# Allegro board f429.brd
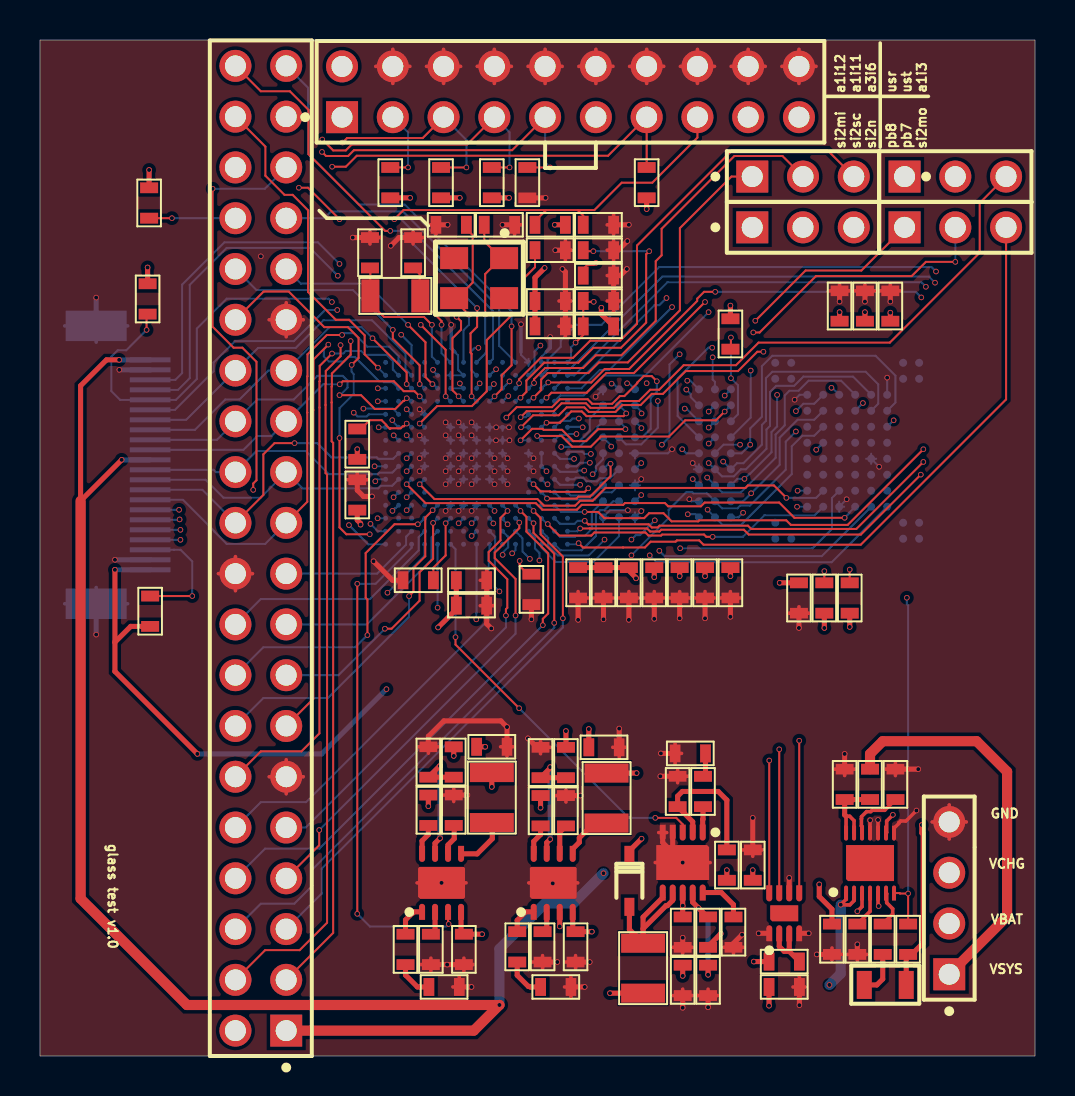
[diagram p0: board, top side]
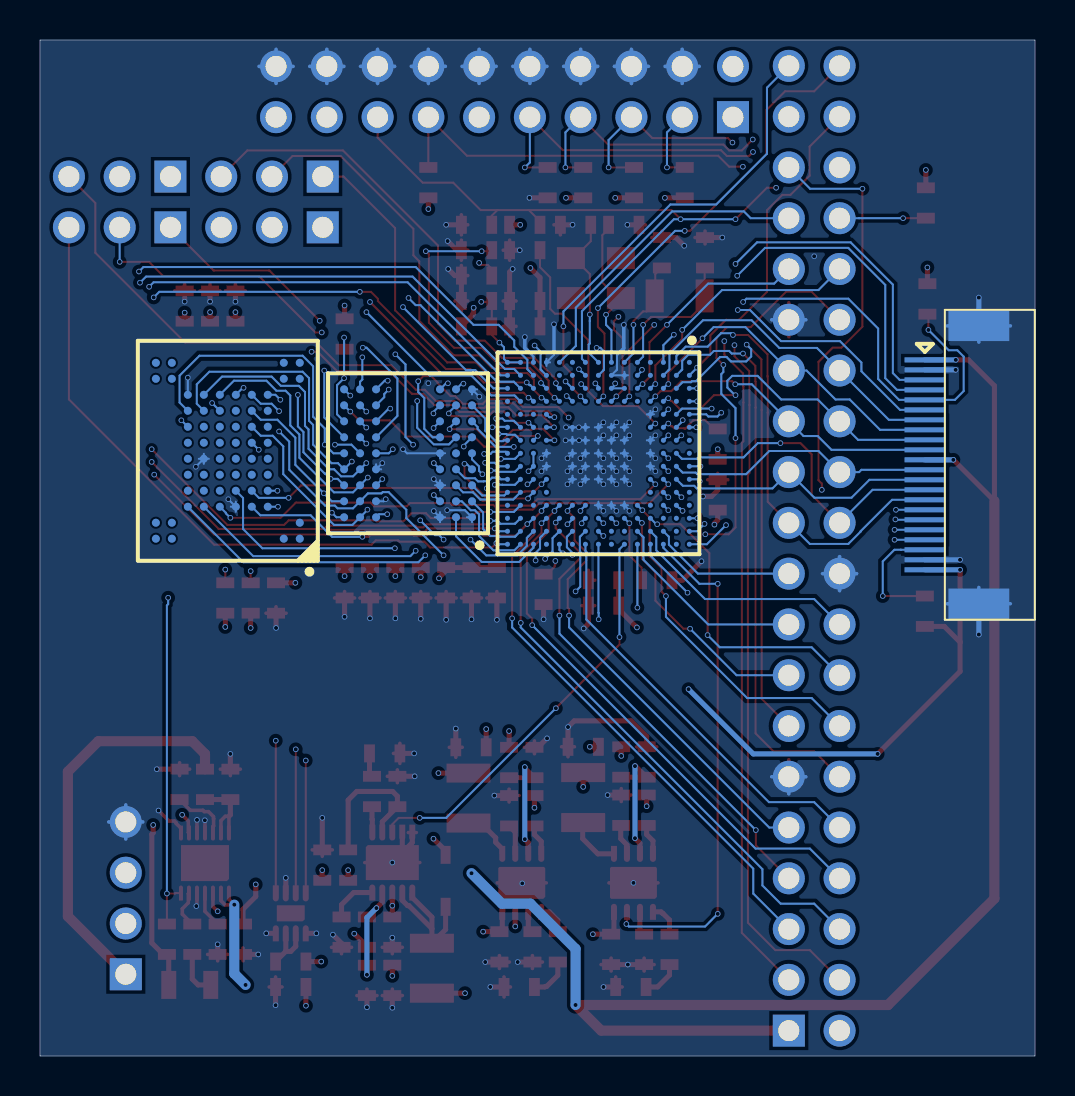
[diagram p1: board, bottom side, seen from below]

Outline 49.78 x 50.83 mm; copper layers: TOP, SIG, POWER, BOTTOM. Coordinates in mm from the lower left corner of the outline.
Outline path: 0,50.83 0,0 49.78,0 49.78,50.83 0,50.83

## Design rules (mm)
net group DATA_BUS: nets PD0 PD1 PD8 PD9 PD10 PD14 PD15 PE7 PE8 PE9 PE10 PE11 PE12 PE13 PE14 PE15
net group LCD_BUS: nets PE5 PE6 PG6 PH2 PH3 PH8 PH9 PH10 PH11 PH12 PH13 PH14 PH15 PI0 PI1 PI2
net group SDRAM_ADD_BUS: nets PF0 PF1 PF2 PF3 PF4 PF5 PF12 PF13 PF14 PF15 PG0 PG1 PG2 PG4 PG5

## Placement (name value [footprint] x y rotation side)
C1  20pF  [0603]  20.57 41.58 0 top
C2  12pF  [0603]  16.51 40.18 270 top
C3  0.1uF  [0603]  27.94 41.58 0 top
C4  0.1uF  [0603]  27.94 37.77 0 top
C5  0.1uF  [0603]  21.59 23.8 0 top
C6  0.1uF  [0603]  21.59 22.53 0 top
C7  0.1uF  [0603]  25.53 36.5 0 top
C8  0.1uF  [0603]  25.53 37.77 0 top
C9  0.1uF  [0603]  26.92 23.67 270 top
C10  0.1uF  [0603]  15.88 28.07 90 top
C19  0.1uF  [0603]  24.59 23.34 270 top
C20  0.1uF  [0603]  18.92 23.8 180 top
C21  4.7uF  [0603]  35.66 9.55 270 top
C23  33nF  [0603]  34.7 6.2 270 top
C24  1nF  [0603]  32.54 15.14 0 top
C25  1uF  [0603]  33.43 3.78 90 top
C26  1uF  [0603]  32.16 6.2 90 top
C27  4.7uF  [0603]  32.16 3.78 90 top
C28  560pF  [0603]  25.81 3.45 180 top
C29  10nF  [0603]  25.15 5.46 90 top
C30  0.1uF  [0603]  37.24 3.45 180 top
C31  4.7uF  [0603]  26.8 5.46 90 top
C32  4.7uF  [0603]  28.22 15.44 180 top
C33  4.7uF  [0603]  40.26 13.59 90 top
C34  560pF  [0603]  20.22 3.45 180 top
C35  10nF  [0603]  19.56 5.33 90 top
C36  4.7uF  [0603]  39.62 5.84 90 top
C37  0.1uF  [0603]  40.89 5.84 90 top
C38  4.7uF  [0603]  21.21 5.33 90 top
C39  4.7uF  [0603]  22.61 15.47 180 top
C40  0.1uF  [0603]  42.55 37.52 90 top
C41  0.1uF  [0603]  41.27 37.52 90 top
C42  0.1uF  [0603]  40.01 37.52 90 top
C43  0.1uF  [0603]  37.97 22.91 270 top
C44  0.1uF  [0603]  30.73 23.67 270 top
C45  0.1uF  [0603]  32 23.67 270 top
C46  0.1uF  [0603]  33.27 23.67 270 top
C47  0.1uF  [0603]  34.54 23.67 270 top
C48  0.1uF  [0603]  29.46 23.67 270 top
C49  0.1uF  [0603]  28.19 23.67 270 top
C51  20pF  [0603]  22.99 41.58 180 top
C52  12pF  [0603]  18.67 40.18 270 top
D1  1n5819  [SOD323]  29.49 8.76 270 top
D2  LED  [0805]  42.29 3.56 0 top
F1  -  [FPC-22]  5.51 34.82 270 bottom
J1  CON3  [H-3]  35.64 43.99 0 top
J2  CON3  [H-3]  43.26 43.99 0 top
J3  CON3  [H-3]  35.64 41.45 0 top
J4  CON3  [H-3]  43.26 41.45 0 top
J5  CON4  [H-4]  45.49 4.09 90 top
L1  10uH  [0603]  27.94 36.5 180 top
L2  1uH  [1008]  30.18 4.39 270 top
L3  1uH  [1008]  28.35 12.9 90 top
L4  1uH  [1008]  22.61 12.93 90 top
O1  OSC-CLK  [OSC-3215]  17.78 38.02 180 top
O2  25M  [OSC-3225]  21.97 38.91 270 top
P1  JTAG  [H-10-2]  15.11 46.96 0 top
P2  LCD  [H-20-2]  12.32 1.27 90 top
R1  10K  [0603]  25.53 41.58 180 top
R2  10K  [0603]  25.53 40.31 0 top
R3  10K  [0603]  27.94 39.04 0 top
R4  10K  [0603]  22.61 43.69 90 top
R5  10K  [0603]  17.53 43.69 90 top
R6  10K  [0603]  20.07 43.69 90 top
R7  10K  [0603]  24.38 43.69 90 top
R8  10K  [0603]  15.88 30.61 270 top
R9  10K  [0603]  30.35 43.69 90 top
R10  10K  [0603]  27.94 40.31 0 top
R11  30K  [0603]  34.37 9.55 90 top
R12  56K  [0603]  33.17 13.23 270 top
R13  10K  [0603]  31.9 13.23 270 top
R14  10  [0603]  33.43 6.2 270 top
R15  0  [0603]  37.24 4.72 0 top
R16  22K  [0603]  25.04 14.68 90 top
R17  33K  [0603]  23.88 5.46 90 top
R18  100K  [0603]  25.04 12.27 270 top
R19  330K  [0603]  26.31 12.27 270 top
R20  68K  [0603]  26.31 14.68 270 top
R21  100K  [0603]  43.43 5.84 270 top
R22  2K  [0603]  42.16 5.84 270 top
R23  0  [0603]  41.53 13.59 90 top
R24  22K  [0603]  18.29 5.33 90 top
R25  22K  [0603]  19.43 14.71 90 top
R26  22K  [0603]  42.8 13.59 90 top
R27  100K  [0603]  19.43 12.29 270 top
R28  330K  [0603]  20.7 12.29 270 top
R29  47K  [0603]  20.7 14.71 270 top
R30  10K  [0603]  5.38 37.87 270 top
R31  10K  [0603]  5.46 42.67 90 top
R32  10K  [0603]  5.51 22.25 90 top
R33  10K  [0603]  40.51 22.91 270 top
R34  10K  [0603]  39.24 22.91 90 top
R35  10K  [0603]  34.54 36.12 90 top
U1  STM32F429  [STM32F429-UFBGA176]  21.84 30.15 270 bottom
U2  RT8509  [RT8509-DFN10]  32.16 9.68 270 top
U3  MAX17048  [MAX17048-TDFN8]  37.24 7.14 90 top
U4  RT8065  [RT8065-DFN8]  25.68 8.66 90 top
U5  MAX8856  [MAX8856-TDFN14]  41.53 9.65 90 top
U6  RT8065  [RT8065-DFN8]  20.09 8.66 90 top
U7  MT29F4G08ABAEAH4  [MT29F4G08ABAEAH4-VFBGA63]  40.39 30.28 0 bottom
U8  MT48LC8M16A2  [MT48LC8M16A2-VFBGA54]  31.37 30.15 0 bottom

## Library data of the parts
C1-C10 C19-C21 C23-C49 C51 C52 = CAP NP
D1 = 1n5819
D2 = LED
F1 = FPC-22
J1-J4 = CON3
J5 = CON4
L1-L4 = INDUCTOR
O1 = OSC-CLK
O2 = OSC-N
P1 = JTAG
P2 = LCD
R1-R35 = R
U1 = STM32F429
U2 = RT8509
U3 = MAX17048
U4 U6 = RT8065
U5 = MAX8856
U7 = MT29F4G08ABAEAH4
U8 = MT48LC8M16A2

## Footprints (pads in the part's own frame, mm; a bottom-side part is the same pattern mirrored in y, then rotated)
0603
  rect 0.54x0.9 smd: 1(-0.76,0) 2(0.76,0)
0805
  rect 0.75x1.4 smd: 1(-1.05,0) 2(1.05,0)
1008
  rect 0.95x2.2 smd: 1(-1.25,0) 2(1.25,0)
FPC-22
  rect 0.254x2.032 smd: 1(0,0) 2(0.5,0) 3(1,0) 4(1.5,0) 5(2,0) 6(2.5,0) 7(3,0) 8(3.5,0) 9(4,0) 10(4.5,0) 11(5,0) 12(5.5,0) 13(6,0) 14(6.5,0) 15(7,0) 16(7.5,0) 17(8,0) 18(8.5,0) 19(9,0) 20(9.5,0) 21(10,0) 22(10.5,0)
  rect 1.524x3.048 smd: 23(-1.7,2.7) 24(12.2,2.7)
H-3
  rect 1.6x1.6 hole 1.05: 1(0,0)
  round 1.6 hole 1.05: 2(2.54,0) 3(5.08,0)
H-4
  rect 1.6x1.6 hole 1.05: 1(0,0)
  round 1.6 hole 1.05: 2(2.54,0) 3(5.08,0) 4(7.62,0)
H-10-2
  rect 1.6x1.6 hole 1.05: 1(0,0)
  round 1.6 hole 1.05: 2(0,2.54) 3(2.54,0) 4(2.54,2.54) 5(5.08,0) 6(5.08,2.54) 7(7.62,0) 8(7.62,2.54) 9(10.16,0) 10(10.16,2.54) 11(12.7,0) 12(12.7,2.54) 13(15.24,0) 14(15.24,2.54) 15(17.78,0) 16(17.78,2.54) 17(20.32,0) 18(20.32,2.54) 19(22.86,0) 20(22.86,2.54)
H-20-2
  rect 1.6x1.6 hole 1.05: 1(0,0)
  round 1.6 hole 1.05: 2(0,2.54) 3(2.54,0) 4(2.54,2.54) 5(5.08,0) 6(5.08,2.54) 7(7.62,0) 8(7.62,2.54) 9(10.16,0) 10(10.16,2.54) 11(12.7,0) 12(12.7,2.54) 13(15.24,0) 14(15.24,2.54) 15(17.78,0) 16(17.78,2.54) 17(20.32,0) 18(20.32,2.54) 19(22.86,0) 20(22.86,2.54) 21(25.4,0) 22(25.4,2.54) 23(27.94,0) 24(27.94,2.54) 25(30.48,0) 26(30.48,2.54) 27(33.02,0) 28(33.02,2.54) 29(35.56,0) 30(35.56,2.54) 31(38.1,0) 32(38.1,2.54) 33(40.64,0) 34(40.64,2.54) 35(43.18,0) 36(43.18,2.54) 37(45.72,0) 38(45.72,2.54) 39(48.26,0) 40(48.26,2.54)
MAX8856-TDFN14
  custom 0.75x0.2 smd: 1(-1.5,1.2) 2(-1.5,0.8) 3(-1.5,0.4) 4(-1.5,0) 5(-1.5,-0.4) 6(-1.5,-0.8) 7(-1.5,-1.2) 8(1.5,-1.2) 9(1.5,-0.8) 10(1.5,-0.4) 11(1.5,0) 12(1.5,0.4) 13(1.5,0.8) 14(1.5,1.2)
  custom 1.8x2.4 smd: 15(0,0)
MAX17048-TDFN8
  custom 0.8x0.3 smd: 1(-1,0.75) 2(-1,0.25) 3(-1,-0.25) 4(-1,-0.75) 5(1,-0.75) 6(1,-0.25) 7(1,0.25) 8(1,0.75)
  custom 0.8x1.4 smd: 9(0,0)
MT29F4G08ABAEAH4-VFBGA63
  round 0.4 smd: A1(-3.6,4.4) A2(-2.8,4.4) A9(2.8,4.4) A10(3.6,4.4) B1(-3.6,3.6) B9(2.8,3.6) B10(3.6,3.6) C3(-2,2.8) C4(-1.2,2.8) C5(-0.4,2.8) C6(0.4,2.8) C7(1.2,2.8) C8(2,2.8) D3(-2,2) D4(-1.2,2) D5(-0.4,2) D6(0.4,2) D7(1.2,2) D8(2,2) E3(-2,1.2) E4(-1.2,1.2) E5(-0.4,1.2) E6(0.4,1.2) E7(1.2,1.2) E8(2,1.2) F3(-2,0.4) F4(-1.2,0.4) F5(-0.4,0.4) F6(0.4,0.4) F7(1.2,0.4) F8(2,0.4) G3(-2,-0.4) G4(-1.2,-0.4) G5(-0.4,-0.4) G6(0.4,-0.4) G7(1.2,-0.4) G8(2,-0.4) H3(-2,-1.2) H4(-1.2,-1.2) H5(-0.4,-1.2) H6(0.4,-1.2) H7(1.2,-1.2) H8(2,-1.2) J3(-2,-2) J4(-1.2,-2) J5(-0.4,-2) J6(0.4,-2) J7(1.2,-2) J8(2,-2) K3(-2,-2.8) K4(-1.2,-2.8) K5(-0.4,-2.8) K6(0.4,-2.8) K7(1.2,-2.8) K8(2,-2.8) L1(-3.6,-3.6) L2(-2.8,-3.6) L9(2.8,-3.6) L10(3.6,-3.6) M1(-3.6,-4.4) M2(-2.8,-4.4) M9(2.8,-4.4) M10(3.6,-4.4)
MT48LC8M16A2-VFBGA54
  round 0.4 smd: A1(-3.2,3.2) A2(-2.4,3.2) A3(-1.6,3.2) A7(1.6,3.2) A8(2.4,3.2) A9(3.2,3.2) B1(-3.2,2.4) B2(-2.4,2.4) B3(-1.6,2.4) B7(1.6,2.4) B8(2.4,2.4) B9(3.2,2.4) C1(-3.2,1.6) C2(-2.4,1.6) C3(-1.6,1.6) C7(1.6,1.6) C8(2.4,1.6) C9(3.2,1.6) D1(-3.2,0.8) D2(-2.4,0.8) D3(-1.6,0.8) D7(1.6,0.8) D8(2.4,0.8) D9(3.2,0.8) E1(-3.2,0) E2(-2.4,0) E3(-1.6,0) E7(1.6,0) E8(2.4,0) E9(3.2,0) F1(-3.2,-0.8) F2(-2.4,-0.8) F3(-1.6,-0.8) F7(1.6,-0.8) F8(2.4,-0.8) F9(3.2,-0.8) G1(-3.2,-1.6) G2(-2.4,-1.6) G3(-1.6,-1.6) G7(1.6,-1.6) G8(2.4,-1.6) G9(3.2,-1.6) H1(-3.2,-2.4) H2(-2.4,-2.4) H3(-1.6,-2.4) H7(1.6,-2.4) H8(2.4,-2.4) H9(3.2,-2.4) J1(-3.2,-3.2) J2(-2.4,-3.2) J3(-1.6,-3.2) J7(1.6,-3.2) J8(2.4,-3.2) J9(3.2,-3.2)
OSC-3215
  rect 0.9x1.65 smd: 1(-1.25,0) 2(1.25,0)
OSC-3225
  rect 1.1x1.4 smd: 1(-1,1.25) 2(-1,-1.25) 3(1,-1.25) 4(1,1.25)
RT8065-DFN8
  custom 0.8x0.3 smd: 1(-1.45,0.975) 2(-1.45,0.325) 3(-1.45,-0.325) 4(-1.45,-0.975) 5(1.45,-0.975) 6(1.45,-0.325) 7(1.45,0.325) 8(1.45,0.975)
  custom 1.6x2.35 smd: 9(0,0)
RT8509-DFN10
  custom 0.8x0.3 smd: 1(-1.5,1) 2(-1.5,0.5) 3(-1.5,0) 4(-1.5,-0.5) 5(-1.5,-1) 6(1.5,-1) 7(1.5,-0.5) 8(1.5,0) 9(1.5,0.5) 10(1.5,1)
  custom 1.75x2.65 smd: 11(0,0)
SOD323
  rect 0.9x0.5 smd: 1(-1.3,0) 2(1.3,0)
STM32F429-UFBGA176
  round 0.25 smd: A1(-4.55,4.55) A2(-3.9,4.55) A3(-3.25,4.55) A4(-2.6,4.55) A5(-1.95,4.55) A6(-1.3,4.55) A7(-0.65,4.55) A8(0,4.55) A9(0.65,4.55) A10(1.3,4.55) A11(1.95,4.55) A12(2.6,4.55) A13(3.25,4.55) A14(3.9,4.55) A15(4.55,4.55) B1(-4.55,3.9) B2(-3.9,3.9) B3(-3.25,3.9) B4(-2.6,3.9) B5(-1.95,3.9) B6(-1.3,3.9) B7(-0.65,3.9) B8(0,3.9) B9(0.65,3.9) B10(1.3,3.9) B11(1.95,3.9) B12(2.6,3.9) B13(3.25,3.9) B14(3.9,3.9) B15(4.55,3.9) C1(-4.55,3.25) C2(-3.9,3.25) C3(-3.25,3.25) C4(-2.6,3.25) C5(-1.95,3.25) C6(-1.3,3.25) C7(-0.65,3.25) C8(0,3.25) C9(0.65,3.25) C10(1.3,3.25) C11(1.95,3.25) C12(2.6,3.25) C13(3.25,3.25) C14(3.9,3.25) C15(4.55,3.25) D1(-4.55,2.6) D2(-3.9,2.6) D3(-3.25,2.6) D4(-2.6,2.6) D5(-1.95,2.6) D6(-1.3,2.6) D7(-0.65,2.6) D8(0,2.6) D9(0.65,2.6) D10(1.3,2.6) D11(1.95,2.6) D12(2.6,2.6) D13(3.25,2.6) D14(3.9,2.6) D15(4.55,2.6) E1(-4.55,1.95) E2(-3.9,1.95) E3(-3.25,1.95) E4(-2.6,1.95) E12(2.6,1.95) E13(3.25,1.95) E14(3.9,1.95) E15(4.55,1.95) F1(-4.55,1.3) F2(-3.9,1.3) F3(-3.25,1.3) F4(-2.6,1.3) F6(-1.3,1.3) F7(-0.65,1.3) F8(0,1.3) F9(0.65,1.3) F10(1.3,1.3) F12(2.6,1.3) F13(3.25,1.3) F14(3.9,1.3) F15(4.55,1.3) G1(-4.55,0.65) G2(-3.9,0.65) G3(-3.25,0.65) G4(-2.6,0.65) G6(-1.3,0.65) G7(-0.65,0.65) G8(0,0.65) G9(0.65,0.65) G10(1.3,0.65) G12(2.6,0.65) G13(3.25,0.65) G14(3.9,0.65) G15(4.55,0.65) H1(-4.55,0) H2(-3.9,0) H3(-3.25,0) H4(-2.6,0) H6(-1.3,0) H7(-0.65,0) H8(0,0) H9(0.65,0) H10(1.3,0) H12(2.6,0) H13(3.25,0) H14(3.9,0) H15(4.55,0) J1(-4.55,-0.65) J2(-3.9,-0.65) J3(-3.25,-0.65) J4(-2.6,-0.65) J6(-1.3,-0.65) J7(-0.65,-0.65) J8(0,-0.65) J9(0.65,-0.65) J10(1.3,-0.65) J12(2.6,-0.65) J13(3.25,-0.65) J14(3.9,-0.65) J15(4.55,-0.65) K1(-4.55,-1.3) K2(-3.9,-1.3) K3(-3.25,-1.3) K4(-2.6,-1.3) K6(-1.3,-1.3) K7(-0.65,-1.3) K8(0,-1.3) K9(0.65,-1.3) K10(1.3,-1.3) K12(2.6,-1.3) K13(3.25,-1.3) K14(3.9,-1.3) K15(4.55,-1.3) L1(-4.55,-1.95) L2(-3.9,-1.95) L3(-3.25,-1.95) L4(-2.6,-1.95) L12(2.6,-1.95) L13(3.25,-1.95) L14(3.9,-1.95) L15(4.55,-1.95) M1(-4.55,-2.6) M2(-3.9,-2.6) M3(-3.25,-2.6) M4(-2.6,-2.6) M5(-1.95,-2.6) M6(-1.3,-2.6) M7(-0.65,-2.6) M8(0,-2.6) M9(0.65,-2.6) M10(1.3,-2.6) M11(1.95,-2.6) M12(2.6,-2.6) M13(3.25,-2.6) M14(3.9,-2.6) M15(4.55,-2.6) N1(-4.55,-3.25) N2(-3.9,-3.25) N3(-3.25,-3.25) N4(-2.6,-3.25) N5(-1.95,-3.25) N6(-1.3,-3.25) N7(-0.65,-3.25) N8(0,-3.25) N9(0.65,-3.25) N10(1.3,-3.25) N11(1.95,-3.25) N12(2.6,-3.25) N13(3.25,-3.25) N14(3.9,-3.25) N15(4.55,-3.25) P1(-4.55,-3.9) P2(-3.9,-3.9) P3(-3.25,-3.9) P4(-2.6,-3.9) P5(-1.95,-3.9) P6(-1.3,-3.9) P7(-0.65,-3.9) P8(0,-3.9) P9(0.65,-3.9) P10(1.3,-3.9) P11(1.95,-3.9) P12(2.6,-3.9) P13(3.25,-3.9) P14(3.9,-3.9) P15(4.55,-3.9) R1(-4.55,-4.55) R2(-3.9,-4.55) R3(-3.25,-4.55) R4(-2.6,-4.55) R5(-1.95,-4.55) R6(-1.3,-4.55) R7(-0.65,-4.55) R8(0,-4.55) R9(0.65,-4.55) R10(1.3,-4.55) R11(1.95,-4.55) R12(2.6,-4.55) R13(3.25,-4.55) R14(3.9,-4.55) R15(4.55,-4.55)

## Nets
2.5V: C39.2 F1.22 L4.2 R29.1 R32.1
3.3V: C5.1 C6.1 C7.1 C8.1 C9.1 C10.1 C32.2 C40.1 C41.1 C42.1 C43.1 C44.1 C45.1 C46.1 C47.1 C48.1 C49.1 D2.2(ANODE) L1.1 L3.2 P2.2(3.3V) R1.1 R4.1 R5.1 R6.1 R8.2 R9.1 R20.1 R21.2 R30.1 R31.2 R33.2 R34.1 R35.2 U1.C5(VDD1) U1.C7(VDD2) U1.C8(VDD3) U1.C9(VDD4) U1.F3(VDD5) U1.G3(VDD6) U1.G13(VDD7) U1.H13(VDD8) U1.J12(VDD9) U1.J13(VDD10) U1.K4(VDD11) U1.N8(VDD12) U1.N9(VDD13) U1.N10(VDD14) U5.9(E\N\2\) U7.D3(VCC1) U7.G4(VCC3) U7.H8(VCC2) U7.J6(VCC4) U8.A7(VDDQ1) U8.A9(VDD1) U8.B3(VDDQ2) U8.C7(VDDQ3) U8.D3(VDDQ4) U8.E7(VDD2) U8.J9(VDD3)
5V: C21.2 C26.2 D1.1 F1.1 F1.11 P2.1(5V) R11.1 U2.8(VSUP)
GND: C1.1 C2.1 C3.2 C4.2 C5.2 C6.2 C7.2 C8.2 C9.2 C10.2 C19.2 C20.2 C21.1 C23.2 C24.1 C25.1 C26.1 C27.1 C28.1 C29.1 C30.1 C31.1 C32.1 C33.2 C34.1 C35.1 C36.1 C37.1 C38.1 C39.1 C40.2 C41.2 C42.2 C43.2 C44.2 C45.2 C46.2 C47.2 C48.2 C49.2 C51.1 C52.1 F1.2 F1.21 F1.23 F1.24 J5.4 P1.4(GND1) P1.6(GND2) P1.8(GND3) P1.10(GND4) P1.12(GND5) P1.14(GND6) P1.16(GND7) P1.18(GND8) P1.20(GND9) P2.11(GND1) P2.20(GND3) P2.29(GND2) R2.2 R3.2 R7.1 R10.2 R13.1 R16.2 R19.1 R25.2 R26.2 R28.1 U1.D5(VSS1) U1.D7(VSS2) U1.D8(VSS3) U1.D9(VSS4) U1.F2(VSS5) U1.F6(VSS6) U1.F7(VSS7) U1.F8(VSS8) U1.F9(VSS9) U1.F10(VSS10) U1.F12(VSS11) U1.G2(VSS12) U1.G6(VSS13) U1.G7(VSS14) U1.G8(VSS15) U1.G9(VSS16) U1.G10(VSS17) U1.G12(VSS18) U1.H6(VSS19) U1.H7(VSS20) U1.H8(VSS21) U1.H9(VSS22) U1.H10(VSS23) U1.H12(VSS24) U1.J6(VSS25) U1.J7(VSS26) U1.J8(VSS27) U1.J9(VSS28) U1.J10(VSS29) U1.K6(VSS30) U1.K7(VSS31) U1.K8(VSS32) U1.K9(VSS33) U1.K10(VSS34) U1.M1(VSSA) U1.M8(VSS35) U1.M9(VSS36) U1.N1(VREF-) U2.4(GND1) U2.5(GND2) U2.11(GND3) U3.1(CTG) U3.4(GND) U3.6(QSTRT) U4.9(GND) U5.5(THM) U5.8(GATE) U5.10(E\N\1\) U5.11(GND) U6.9(GND) U7.C5(VSS3) U7.F7(VSS4) U7.K3(VSS1) U7.K8(VSS2) U8.A1(VSS1) U8.A3(VSSQ1) U8.B7(VSSQ2) U8.C3(VSSQ3) U8.D7(VSSQ4) U8.E3(VSS2) U8.J1(VSS3)
VBAT: C30.2 J5.2 R15.1 U5.1(BAT1) U5.2(BAT2)
VDDA: C4.1 L1.2 U1.C1(VBAT) U1.P1(VREF+) U1.R1(VDDA)
BOOT0: R2.1 U1.D6(BOOT0)
BOOT1: R3.1 U1.M6(PB2(BOOT1))
BYPASS: R10.1 U1.L4(BYPASS_REG)
OSC32-IN: C2.2 O1.2(X2) U1.E1(PC14(OSC32_IN))
OSC32-OUT: C52.2 O1.1(X1) U1.F1(PC15(OSC32_OUT))
OSC-IN: C1.2 O2.3(X2) U1.G1(PH0(OSC_IN))
OSC-OUT: C51.2 O2.1(X1) U1.H1(PH1(OSC_OUT)
PA0: R21.1 U1.N3(PA0) U5.7(P\O\K\)
PA1: U1.N2(PA1) U3.5(A\L\R\T\)
PA2: U1.P2(PA2) U3.7(SCL)
PA3: U1.R2(PA3) U3.8(SDA)
PA4: F1.3 U1.N4(PA4)
PA5: F1.4 U1.P4(PA5)
PA6: F1.5 R30.2 U1.P3(PA6)
PA7: F1.6 U1.R3(PA7)
PA8: U1.F15(PA8) U2.3(EN)
PA9: J2.2 U1.E15(PA9)
PA10: J2.1 U1.D15(PA10)
PA11: U1.C15(PA11) U6.3(EN)
PB5: U1.A6(PB5) U8.F3(CKE)
PB6: R35.1 U1.B6(PB6) U8.G9(C\S\)
PB7: J4.2 U1.B5(PB7)
PB8: J4.1 U1.A5(PB8)
PB12: J3.3 U1.P12(PB12)
PB13: J3.2 U1.P13(PB13)
PB14: J3.1 U1.R14(PB14)
PB15: J4.3 U1.R15(PB15)
PC0: U1.M2(PC0) U8.F9(W\E\)
PC1: J1.2 U1.M3(PC1)
PC2: J1.1 U1.M4(PC2)
PC3: J2.3 U1.M5(PC3)
PC6: P2.35(USART_TX) U1.H15(PC6)
PD0: U1.B12(PD0) U7.K4(I/O2) U8.B8(DQ2)
PD1: U1.C12(PD1) U7.K5(I/O3) U8.C9(DQ3)
PD4: U1.D10(PD4) U7.D4(R\E\)
PD5: U1.C11(PD5) U7.C7(W\E\)
PD6: U1.B11(PD6) U7.C8(R\/\B\)
PD8: U1.P15(PD8) U8.B2(DQ13)
PD9: U1.P14(PD9) U8.B1(DQ14)
PD10: U1.N15(PD10) U8.A2(DQ15)
PD11: U1.N14(PD11) U7.D5(CLE)
PD12: U1.N13(PD12) U7.C4(ALE)
PD14: U1.M14(PD14) U7.H4(I/O0) U8.A8(DQ0)
PD15: U1.L14(PD15) U7.J4(I/O1) U8.B9(DQ1)
PDR_ON: R8.1 U1.C6(PDR_ON)
PE0: U1.A4(PE0) U8.E8(DQML)
PE1: U1.A3(PE1) U8.F1(DQMH)
PE2: P2.38(INT) U1.A2(PE2)
PE4: F1.15 P2.21(B0) U1.B1(PE4)
PE5: P2.12(G0) U1.B2(PE5)
PE6: P2.13(G1) U1.B3(PE6)
PE7: U1.R8(PE7) U7.K6(I/O4) U8.C8(DQ4)
PE8: U1.P8(PE8) U7.J7(I/O5) U8.D9(DQ5)
PE9: U1.P9(PE9) U7.K7(I/O6) U8.D8(DQ6)
PE10: U1.R9(PE10) U7.J8(I/O7) U8.E9(DQ7)
PE11: U1.P10(PE11) U8.E1(DQ8)
PE12: U1.R10(PE12) U8.D2(DQ9)
PE13: U1.N11(PE13) U8.D1(DQ10)
PE14: U1.P11(PE14) U8.C2(DQ11)
PE15: U1.R11(PE15) U8.C1(DQ12)
PF0: U1.E2(PF0) U8.H7(A0)
PF1: U1.H3(PF1) U8.H8(A1)
PF2: U1.H2(PF2) U8.J8(A2)
PF3: U1.J2(PF3) U8.J7(A3)
PF4: U1.J3(PF4) U8.J3(A4)
PF5: U1.K3(PF5) U8.J2(A5)
PF8: J1.3 U1.L3(PF8)
PF10: F1.16 P2.33(DE) U1.L1(PF10)
PF11: U1.R6(PF11) U8.F8(R\A\S\)
PF12: U1.P6(PF12) U8.H3(A6)
PF13: U1.N6(PF13) U8.H2(A7)
PF14: U1.R7(PF14) U8.H1(A8)
PF15: U1.P7(PF15) U8.G3(A9)
PG0: U1.N7(PG0) U8.H9(A10)
PG1: U1.M7(PG1) U8.G2(A11)
PG2: U1.L15(PG2) U8.G1(NC/A12)
PG4: U1.K14(PG4) U8.G7(BA0)
PG5: U1.K13(PG5) U8.G8(BA1)
PG6: P2.10(R7) U1.J15(PG6)
PG7: F1.19 P2.30(CLK) U1.J14(PG7)
PG8: U1.H14(PG8) U8.F2(CLK)
PG9: R33.1 U1.C10(PG9) U7.C6(C\E\)
PG10: F1.13 P2.23(B2) U1.B10(PG10)
PG11: F1.12 P2.24(B3) U1.B9(PG11)
PG12: F1.14 P2.22(B1) U1.B8(PG12)
PG15: U1.B7(PG15) U8.F7(C\A\S\)
PH2: P2.3(R0) U1.F4(PH2)
PH3: P2.4(R1) U1.G4(PH3)
PH4: P2.40(IIC_SCL) U1.H4(PH4)
PH5: P2.39(IIC_SDA) U1.J4(PH5)
PH8: P2.5(R2) U1.M12(PH8)
PH9: P2.6(R3) U1.M13(PH9)
PH10: P2.7(R4) U1.L13(PH10)
PH11: P2.8(R5) U1.L12(PH11)
PH12: P2.9(R6) U1.K12(PH12)
PH13: P2.14(G2) U1.E12(PH13)
PH14: P2.15(G3) U1.E13(PH14)
PH15: P2.16(G4) U1.D13(PH15)
PI0: P2.17(G5) U1.E14(PI0)
PI1: P2.18(G6) U1.D14(PI1)
PI2: P2.19(G7) U1.C14(PI2)
PI4: F1.10 P2.25(B4) U1.D4(PI4)
PI5: F1.9 P2.26(B5) U1.C4(PI5)
PI6: F1.8 P2.27(B6) U1.C3(PI6)
PI7: F1.7 P2.28(B7) U1.C2(PI7)
PI9: F1.17 P2.32(VSYNC) U1.D3(PI9)
PI10: F1.18 P2.31(HSYNC) U1.E3(PI10)
RESET: C3.1 P1.15(R\E\S\E\T\) P2.36(RESET) R1.2 U1.J1(NRST)
TCK: P1.9(TCK) R7.2 U1.A14(PA14(TCK))
TDI: P1.5(TDI) R6.2 U1.A13(PA15(TDI))
TDO: P1.13(TD0) R9.2 U1.A10(PB3(TDO))
TMS: P1.7(TMS) R4.2 U1.A15(PA13(TMS))
TRST: P1.3(TRST) R5.2 U1.A9(PB4(TRST))
VCAP_1: C19.1 U1.M10(VCAP_1)
VCAP_2: C20.1 U1.F13(VCAP_2)
VCHG: C36.2 J5.3 U5.3(IN)
VSYS: C27.2 C31.2 C38.2 J5.1 L2.2 R14.2 R18.1 R23.2 R27.1 U4.3(EN) U4.4(VIN) U6.4(VIN)
N01118: R34.2 U7.C3(W\P\)
N38204: C24.2 R12.1
N38208: R12.2 U2.1(COMP)
N38309: R11.2 R13.2 U2.2(FB)
N38609: D1.2 L2.1 U2.6(LX2) U2.7(LX1)
N38635: C23.1 U2.10(SS)
N38673: C25.2 R14.1 U2.9(VIN)
N41471: R24.2 U6.1(COMP)
N41478: C34.2 R24.1
N41859: C35.2 U6.2(SS)
N42064: R25.1 R29.2 U6.7(FB)
N42113: L4.1 U6.5(LX)
N42120: R28.2 U6.6(RT)
N43226: R17.2 U4.1(COMP)
N43250: C28.2 R17.1
N43394: C29.2 U4.2(SS)
N43434: R16.1 R20.2 U4.7(FB)
N43458: L3.1 U4.5(LX)
N43466: R19.2 U4.6(RT)
N47223: C37.2 U5.4(VL)
N48977: C33.1 R23.1 U5.13(SYS2) U5.14(SYS1)
N49830: R26.1 U5.12(SETI)
N55342: R15.2 U3.2(CELL) U3.3(VDD)
N58225: F1.20 R32.2
N64320: D2.1(CATHODE) R22.2
N64376: R22.1 U5.6(C\H\G\)
N66109: P2.34(BL) R31.1
N72052: R27.2 U6.8(PGOOD)
N72374: R18.2 U4.8(PGOOD)

Pads without a net: O2 2 4; P1 1 2 11 17 19; P2 37; U1 A1 A7 A8 A11 A12 B4 B13 B14 B15 C13 D1 D2 D11 D12 E4 F14 G14 G15 K1 K2 K15 L2 M11 M15 N5 N12 P5 R4 R5 R12 R13; U3 9; U5 15; U7 A1 A2 A9 A10 B1 B9 B10 D6 D7 D8 E3 E4 E5 E6 E7 E8 F3 F4 F5 F6 F8 G3 G5 G6 G7 G8 H3 H5 H6 H7 J3 J5 L1 L2 L9 L10 M1 M2 M9 M10; U8 E2

## Via types
v1: diameter 0.279, hole 0.203, TOP to BOTTOM, 422 vias

## Routing (per net, layer and track width the routed paths; a pad name or vN(x,y) marks a point on that pad's centre or on a via; arc(x,y) is an arc through that point)
2.5V: length 27.2
  TOP w0.254: 3.75,20.7 v1(3.75,24.32) ; 3.75,20.7 3.75,19.24 v1(7.87,15.11) ; 3.75,20.7 4.54,21.49 R32.1 ; C39.2 v1(22.28,15.47) ; R29.1 v1(20.7,15.01) ; L4.2 v1(22.61,13.46)
  BOTTOM w0.254: v1(7.87,15.11) 14.1,15.11 v1(17.34,18.35) ; F1.22 v1(3.75,24.32)
3.3V: length 51.1
  TOP w0.178: v1(42.67,12.06) 42.36,11.75 42.36,11.18 U5.9
  TOP w0.254: R5.1 v1(18.52,42.93) ; C7.1 C8.1 24.77,38.94 v1(25.25,39.42) ; C44.1 v1(30.73,23.95) ; R31.2 v1(5.46,44.32) ; R6.1 v1(21,42.93) ; C45.1 v1(32,24) ; C40.1 v1(42.55,37.19) ; C41.1 v1(41.27,37.21) ; v1(29.82,23.9) 29.82,23.93 29.46,24.28 C48.1 C49.1 C9.1 ; R33.2 v1(40.51,21.46) ; R1.1 v1(25.76,41.58) ; R35.2 v1(34.54,37.54) ; v1(16.04,26.58) 16.04,26.64 15.88,26.81 C10.1 ; L3.2 v1(29.85,14.15) ; R4.1 v1(23.47,42.93) ; L1.1 28.13,37.07 28.13,37.13 28.09,37.17 v1(28.09,37.43) ; v1(19.92,21.44) 20.83,22.35 C6.1 C5.1 ; R8.2 v1(15.88,30.35) ; R34.1 v1(39.24,21.41) ; D2.2 43.34,4.99 R21.2 43.61,5.08 44.19,5.66 44.19,11.09 44.12,11.16 v1(44.12,11.56) ; R20.1 v1(26.31,16.26) ; R9.1 v1(30.35,42.37) ; C42.1 v1(40.01,37.21) ; R30.1 v1(5.38,39.45) ; C32.2 v1(27.46,16.36) ; C43.1 v1(37.01,23.67) ; C46.1 v1(33.27,24) ; C47.1 v1(34.54,24)
  POWER w0.178: P2.2 9.78,2.12 ; P2.2 10.63,1.27 ; P2.2 9.78,0.42 ; P2.2 8.93,1.27
  BOTTOM w0.102: U1.N8 U1.N9 v1(25.34,29.25) ; U1.N10 25.34,28.6 v1(25.39,28.6) ; v1(18.35,32.35) 18.35,32.35 U1.C5 ; U1.J12 22.74,27.3 v1(22.74,27.27) ; v1(18.35,29.25) U1.C9 ; U1.K4 23.41,33.01 v1(23.43,33.01) ; U7.D3 v1(37.9,28.28) ; v1(32.41,27.1) 32.82,27.1 U8.A7 ; U8.A9 34.95,26.95 v1(35.18,27.18) ; v1(32.66,28.86) U8.C7 ; v1(30.08,28.06) U8.B3 ; v1(21.01,33.64) 21.06,33.59 21.06,33.54 U1.G3 U1.F3 ; v1(20.95,26.65) U1.G13 ; U8.E7 32.33,30.15 v1(32.13,30.35) ; v1(18.35,29.9) U1.C8 ; U7.J6 v1(41.17,32.66) ; v1(34.26,33.04) U8.J9 ; U8.D3 v1(30.08,29.66) ; v1(22.68,26.64) 22.72,26.68 22.72,26.68 U1.J13 ; U1.H13 v1(21.6,26.65) ; U1.C7 v1(18.35,31.05) ; U7.H8 v1(42.71,31.8) ; U7.G4 v1(38.84,30.33)
5V: length 81.2
  TOP w0.254: R11.1 v1(34.37,9.3) ; v1(4.09,29.82) 2.03,27.77 2.03,33.53 3.33,34.82 v1(3.96,34.82) ; C26.2 v1(32.16,7.52) U2.8 ; v1(30.1,10.87) 29.49,10.26 D1.1 ; C21.2 v1(35.66,9.3)
  TOP w0.508: P2.1 21.7,1.27 v1(22.99,2.55) 7.35,2.55 2.03,7.87 2.03,27.77
  BOTTOM w0.254: F1.1 v1(3.96,34.82) ; F1.11 v1(4.09,29.82)
  BOTTOM w0.508: v1(22.99,2.55) 22.99,5.36 25.25,7.62 26.67,7.62 v1(28.19,9.14)
GND: length 331.9
  TOP w0.178: P1.8 22.73,50.36 ; P1.8 21.88,49.5 ; P1.8 22.73,48.65 ; P1.8 23.58,49.5 ; 22.03,23.8 C5.2 22.35,24.3 ; C45.2 32.51,22.91 ; C45.2 31.5,22.91 ; C45.2 32,23.23 ; 22.67,22.53 C6.2 22.03,22.53 ; C41.2 41.78,38.28 ; C41.2 40.77,38.28 ; C41.2 41.27,38.6 ; 26.31,12.71 R19.1 ; R19.1 25.81,13.03 ; R19.1 26.31,13.35 ; 35.66,9.99 C21.1 ; C21.1 36.16,10.31 ; C21.1 35.16,10.31 ; 31.78,14.64 C24.1 ; C24.1 32.1,15.14 ; C24.1 31.78,15.64 ; 39.76,14.35 C33.2 ; C33.2 40.76,14.35 ; C33.2 40.26,14.03 ; v1(41.53,11.79) 41.53,11.79 U5.11 ; C44.2 31.24,22.91 ; C44.2 30.23,22.91 ; C44.2 30.73,23.23 ; 17.65,48.65 P1.4 ; P1.4 18.5,49.5 ; P1.4 16.8,49.5 ; P1.4 17.65,50.36 ; 34.58,49.5 P1.18 ; P1.18 35.43,48.65 ; P1.18 36.28,49.5 ; P1.18 35.43,50.36 ; 24.42,49.5 P1.10 ; P1.10 25.27,48.65 ; P1.10 25.27,50.36 ; P1.10 26.12,49.5 ; 28.66,15.44 C32.1 ; C32.1 28.98,14.94 ; C32.1 29.3,15.44 ; 26.96,49.5 P1.12 ; P1.12 27.81,50.36 ; P1.12 28.66,49.5 ; P1.12 27.81,48.65 ; P2.11 13.17,13.97 ; P2.11 12.32,13.12 ; P2.11 11.47,13.97 ; P2.11 12.32,14.82 ; 26.91,8.66 U4.9 24.45,8.66 ; 34.7,5.12 C23.2 ; C23.2 35.2,5.44 ; C23.2 34.2,5.44 ; 8.93,24.13 P2.20 ; P2.20 9.78,23.28 ; P2.20 10.63,24.13 ; P2.20 9.78,24.98 ; 15.37,28.83 C10.2 ; C10.2 16.38,28.83 ; C10.2 15.88,29.15 ; 28.38,37.77 C4.2 ; C4.2 29.02,37.77 ; C4.2 28.7,37.27 ; 45.49,10.86 J5.4 ; J5.4 44.64,11.71 ; J5.4 45.49,12.56 ; J5.4 46.34,11.71 ; 19.49,41.58 C1.1 19.81,41.08 ; C49.2 28.7,22.91 ; C49.2 28.19,23.23 ; C49.2 27.69,22.91 ; 30.35,48.65 P1.14 ; P1.14 30.35,50.36 ; P1.14 29.5,49.5 ; P1.14 31.2,49.5 ; 19.43,15.15 R25.2 ; R25.2 18.93,15.47 ; R25.2 19.93,15.47 ; 28.96,22.91 C48.2 ; C48.2 29.97,22.91 ; C48.2 29.46,23.23 ; C31.1 26.8,5.02 ; C31.1 26.3,4.7 ; C31.1 26.8,4.38 ; 23.75,41.08 C51.1 24.07,41.58 ; 28.7,41.08 C3.2 ; C3.2 28.7,42.08 ; C3.2 28.38,41.58 ; 34.04,22.91 C47.2 ; C47.2 35.05,22.91 ; C47.2 34.54,23.23 ; P1.6 21.04,49.5 ; P1.6 19.34,49.5 ; P1.6 20.19,50.36 ; P1.6 20.19,48.65 ; C39.1 23.69,15.47 ; C39.1 23.37,14.97 ; C39.1 23.04,15.47 ; C30.1 38.32,3.45 ; C30.1 38,3.96 ; C30.1 37.68,3.45 ; C40.2 42.55,38.6 ; C40.2 43.05,38.28 ; C40.2 42.04,38.28 ; C52.1 18.67,41.26 ; C52.1 18.67,40.62 ; C52.1 19.17,40.94 ; C2.1 17.01,40.94 ; C2.1 16.51,41.26 ; C2.1 16.51,40.62 ; 30.78,9.68 v1(32.16,9.68) 33.53,9.68 ; 20.2,13.05 R28.1 ; R28.1 20.7,13.37 ; R28.1 20.7,12.73 ; 40.39,5.08 C37.1 ; C37.1 40.89,4.76 ; C37.1 41.4,5.08 ; 39.5,38.28 C42.2 ; C42.2 40.51,38.28 ; C42.2 40.01,38.6 ; 26.29,36 C7.2 ; C7.2 26.61,36.5 ; C7.2 25.97,36.5 ; P1.20 38.82,49.5 ; P1.20 37.97,50.36 ; P1.20 37.97,48.65 ; P1.20 37.12,49.5 ; C25.1 33.43,3.35 ; C25.1 32.93,3.02 ; C25.1 33.93,3.02 ; R13.1 32.4,13.99 ; R13.1 31.9,13.67 ; R13.1 31.9,14.31 ; U5.10 v1(41.93,11.81) ; C28.1 26.57,3.96 ; C28.1 26.57,2.95 ; C28.1 26.25,3.45 ; R2.2 26.29,40.81 ; R2.2 26.61,40.31 ; R2.2 26.29,39.81 ; 20.66,3.45 C34.1 20.98,3.96 ; 11.47,36.83 P2.29 ; P2.29 12.32,37.68 ; P2.29 12.32,35.98 ; P2.29 13.17,36.83 ; C38.1 21.71,4.57 ; C38.1 21.21,4.9 ; C38.1 21.21,4.25 ; 28.7,39.81 R10.2 ; R10.2 28.38,40.31 ; R10.2 28.7,40.81 ; 26.61,37.77 C8.2 25.97,37.77 ; C46.2 33.27,23.23 ; C46.2 32.77,22.91 ; C46.2 33.78,22.91 ; C27.1 32.66,3.02 ; C27.1 31.66,3.02 ; C27.1 32.16,3.35 ; 42.8,14.03 R26.2 ; R26.2 42.3,14.35 ; R26.2 42.8,14.67 ; 27.43,22.91 C9.2 26.92,23.23 ; C43.2 38.47,22.15 ; C43.2 37.97,22.47 ; C43.2 37.47,22.15 ; C36.1 39.62,5.4 ; C36.1 40.13,5.08 ; C36.1 39.62,4.76 ; v1(43.85,12.28) 43.33,11.76 43.06,11.76 42.97,11.67 42.97,11.63 42.73,11.39 U5.8 ; C29.1 25.15,5.02 ; C29.1 24.64,4.7 ; C29.1 25.15,4.38 ; 30.95,11.18 U2.5 31.36,11.18 ; 32.04,49.5 P1.16 ; P1.16 32.89,50.36 ; P1.16 33.74,49.5 ; P1.16 32.89,48.65 ; R16.2 25.04,15.76 ; R16.2 25.55,15.44 ; R16.2 25.04,15.12 ; U5.5 41.93,7.53 v1(41.96,7.5) ; 21.32,8.66 v1(20.09,8.66) 18.87,8.66 ; 28.7,39.54 R3.2 28.38,39.04 ; 32.16,5.12 C26.1 ; C26.1 31.66,5.44 ; C26.1 32.66,5.44 ; C35.1 19.56,4.9 ; C35.1 19.56,4.25 ; C35.1 19.06,4.57
  TOP w0.254: C43.2 v1(37.97,21.41) ; 31.66,10.18 U2.4 ; 31.66,10.18 v1(32.16,9.68) ; 31.66,10.18 31.16,10.68 U2.5 ; R10.2 28.93,40.31 v1(29.39,40.77) ; C38.1 v1(20.37,4.57) C35.1 ; C48.2 v1(29.46,21.82) ; C40.2 v1(42.55,37.74) ; C7.2 C8.2 26.29,39.22 v1(26.14,39.37) ; R25.2 19.43,15.99 20.2,16.76 23.06,16.76 v1(23.37,16.46) C39.1 ; C19.2 v1(24.59,21.84) ; C34.1 v1(21.59,3.45) ; C44.2 v1(30.73,21.87) ; C29.1 v1(25.88,4.7) ; R2.2 v1(25.78,40.31) ; C32.1 v1(28.98,16.38) ; C21.1 v1(35.66,11.91) ; C1.1 v1(20.4,41.58) ; C24.1 v1(31.06,15.14) ; C45.2 v1(32,21.89) ; C2.1 v1(15.65,40.94) ; v1(22.58,21.39) 22.35,21.62 C6.2 C5.2 ; C46.2 v1(33.27,21.89) ; v1(35.13,6.07) 34.7,5.64 C23.2 ; U3.6 v1(37.49,8.91) ; C51.1 v1(23.14,41.58) ; R19.1 v1(27.05,13.03) ; R26.2 v1(43.94,14.35) ; C28.1 v1(27.25,3.45) ; C27.1 v1(32.16,2.41) ; v1(16.61,27.99) 16.19,27.99 15.88,28.3 C10.2 ; C37.1 v1(40.89,5.59) ; U3.4 v1(38.46,6.14) ; C9.2 v1(26.92,21.82) ; C31.1 v1(27.51,4.7) ; R13.1 v1(31.04,13.99) ; C36.1 v1(38.86,5.08) ; v1(16.69,24.75) 17.64,23.8 C20.2 ; C49.2 v1(28.19,21.84) ; C3.2 v1(29.46,41.58) ; C30.1 v1(38,2.54) ; C52.1 17.96,40.94 v1(17.55,40.53) ; v1(24.41,15.89) 24.86,15.44 R16.2 ; C47.2 v1(34.54,21.97) ; U3.1 v1(35.96,6.14) ; C25.1 v1(33.43,2.44) ; C41.2 v1(41.27,37.74) ; v1(29.36,39.37) 29.03,39.04 R3.2 C4.2 ; C42.2 v1(40.01,37.74) ; R28.1 v1(21.38,13.05) ; C26.1 v1(32.16,5.92) ; C33.2 v1(40.26,15.11) ; R7.1 v1(25.3,42.93)
  SIG w0.178: 37.97,48.65 P1.20 ; P1.20 37.12,49.5 ; P1.20 38.82,49.5 ; P1.20 37.97,50.36 ; P1.12 27.81,50.36 ; P1.12 26.96,49.5 ; P1.12 28.66,49.5 ; P1.12 27.81,48.65 ; P1.18 36.28,49.5 ; P1.18 35.43,50.36 ; P1.18 35.43,48.65 ; P1.18 34.58,49.5 ; 11.47,13.97 P2.11 ; P2.11 12.32,14.82 ; P2.11 12.32,13.12 ; P2.11 13.17,13.97 ; P1.10 26.12,49.5 ; P1.10 25.27,50.36 ; P1.10 25.27,48.65 ; P1.10 24.42,49.5 ; 21.88,49.5 P1.8 ; P1.8 22.73,48.65 ; P1.8 23.58,49.5 ; P1.8 22.73,50.36 ; 30.35,48.65 P1.14 ; P1.14 31.2,49.5 ; P1.14 29.5,49.5 ; P1.14 30.35,50.36 ; 32.04,49.5 P1.16 ; P1.16 32.89,48.65 ; P1.16 33.74,49.5 ; P1.16 32.89,50.36 ; P2.20 9.78,24.98 ; P2.20 9.78,23.28 ; P2.20 8.93,24.13 ; P2.20 10.63,24.13 ; 45.49,10.86 J5.4 ; J5.4 44.64,11.71 ; J5.4 46.34,11.71 ; J5.4 45.49,12.56 ; 17.65,48.65 P1.4 ; P1.4 17.65,50.36 ; P1.4 16.8,49.5 ; P1.4 18.5,49.5 ; 19.34,49.5 P1.6 ; P1.6 20.19,48.65 ; P1.6 21.04,49.5 ; P1.6 20.19,50.36
  POWER w0.102: v1(32.49,27.85) 32.49,28.22 32.07,28.64 32.07,29.07 v1(32.66,29.66) ; v1(30.35,33.66) 30.35,33.27 30.12,33.04 28.17,33.04 28.12,32.98 v1(27.8,32.98)
  POWER w0.178: P2.29 11.05,38.1 v1(11.05,40.01)
  BOTTOM w0.102: 21.84,28.67 U1.H10 ; U1.H10 v1(21.6,28.6) ; U1.H10 21.84,29.03 ; U1.H10 22.02,28.85 ; U1.H10 21.67,28.85 ; U1.H9 22.02,29.5 ; U1.H9 21.67,29.5 ; U1.H9 21.84,29.32 ; U1.H9 21.84,29.68 ; U1.H9 v1(21.6,29.25) ; U7.K8 v1(42.39,33.93) ; v1(23.47,31.45) U1.K6 ; U1.K6 23.14,31.27 ; U1.K6 22.97,31.45 ; U1.F9 20.72,29.5 ; U1.F9 20.54,29.32 ; U1.F9 20.54,29.68 ; U1.F9 v1(20.3,29.25) ; U1.F9 20.37,29.5 ; v1(22.74,29.25) U1.J9 ; U1.J9 22.49,29.32 ; U1.J9 22.67,29.5 ; U1.J9 22.49,29.68 ; U1.J9 22.32,29.5 ; 20.37,27.55 U1.F12 ; U1.F12 20.3,27.3 v1(20.3,27.27) ; U1.F12 20.54,27.37 ; U1.F12 20.72,27.55 ; U1.F12 20.54,27.73 ; U1.K7 23.14,30.98 ; U1.K7 22.97,30.8 ; U1.K7 23.14,30.62 ; U1.K7 v1(23.49,30.8) ; U1.M8 24.44,30.33 ; U1.M8 24.62,30.15 ; U1.M8 24.44,29.97 ; U1.M8 v1(24.69,29.9) ; U1.M8 24.27,30.15 ; U1.G6 21.19,31.63 ; U1.G6 v1(20.95,31.7) ; U1.G6 21.02,31.45 ; U1.G6 21.37,31.45 ; U1.G6 21.19,31.27 ; 21.19,27.37 U1.G12 ; U1.G12 21.19,27.73 ; U1.G12 21.02,27.55 ; U1.G12 21.37,27.55 ; U1.G12 20.95,27.3 v1(20.95,27.27) ; 29.52,30.15 U8.E3 ; U8.E3 31.42,30.15 v1(31.62,30.35) ; U8.E3 29.77,29.9 ; 21.67,27.55 U1.H12 ; U1.H12 21.6,27.3 v1(21.6,27.27) ; U1.H12 21.84,27.37 ; U1.H12 21.84,27.73 ; U1.H12 22.02,27.55 ; U1.G9 21.19,29.68 ; U1.G9 21.02,29.5 ; U1.G9 21.37,29.5 ; U1.G9 v1(20.95,29.25) ; U1.G9 21.19,29.32 ; U8.C3 30.02,28.55 ; U8.C3 29.52,28.55 ; U8.C3 29.77,28.3 ; U8.C3 v1(30.08,28.86) ; U8.C3 29.77,28.8 ; 20.37,30.15 U1.F8 ; U1.F8 20.72,30.15 ; U1.F8 20.54,29.97 ; U1.F8 20.54,30.33 ; U1.F8 v1(20.3,29.9) ; U8.A3 29.77,27.2 ; U8.A3 29.52,26.95 ; U8.A3 30.02,26.95 ; U8.A3 29.77,26.7 ; U8.A3 v1(30.08,27.26) ; 24.07,35.21 24.07,35.08 U1.M1 ; U1.J6 22.49,31.63 ; U1.J6 22.49,31.27 ; U1.J6 v1(22.82,31.45) ; U1.J6 22.32,31.45 ; v1(20.3,31.7) U1.F6 ; U1.F6 20.37,31.45 ; U1.F6 20.54,31.27 ; U1.F6 20.54,31.63 ; U1.F6 20.72,31.45 ; U1.D5 19.24,32.28 ; U1.D5 19,32.35 v1(19,32.35) ; U1.D5 19.42,32.1 ; U1.D5 19.24,31.92 ; U1.D5 19.07,32.1 ; 21.67,31.45 U1.H6 ; U1.H6 v1(21.6,31.7) ; U1.H6 21.84,31.63 ; U1.H6 22.02,31.45 ; U1.H6 21.84,31.27 ; U1.D9 19.42,29.5 ; U1.D9 19.24,29.32 ; U1.D9 v1(19,29.25) ; U1.D9 19.07,29.5 ; U1.D9 19.24,29.68 ; U1.H8 21.84,30.33 ; U1.H8 21.84,29.97 ; U1.H8 22.02,30.15 ; U1.H8 v1(21.6,29.9) ; U1.H8 21.67,30.15 ; U1.F7 20.72,30.8 ; U1.F7 20.37,30.8 ; U1.F7 v1(20.3,31.05) ; U1.F7 20.54,30.62 ; U1.F7 20.54,30.98 ; 25.32,35.21 25.09,34.99 U1.N1 ; v1(20.95,28.6) U1.G10 ; U1.G10 21.19,28.67 ; U1.G10 21.19,29.03 ; U1.G10 21.37,28.85 ; U1.G10 21.02,28.85 ; U1.F10 20.72,28.85 ; U1.F10 20.54,29.03 ; U1.F10 v1(20.3,28.6) ; U1.F10 20.54,28.67 ; U1.F10 20.37,28.85 ; U8.B7 32.59,27.75 v1(32.49,27.85) ; U1.K8 23.14,30.33 ; U1.K8 23.32,30.15 ; U1.K8 v1(23.39,29.9) ; U1.K8 22.97,30.15 ; U1.K8 23.14,29.97 ; 21.67,30.8 U1.H7 ; U1.H7 21.84,30.62 ; U1.H7 22.02,30.8 ; U1.H7 v1(21.6,31.05) ; U1.H7 21.84,30.98 ; 24.27,34.7 U1.M1 ; U1.M1 24.44,34.52 ; U1.M1 24.44,34.88 ; v1(20.95,29.9) U1.G8 ; U1.G8 21.19,29.97 ; U1.G8 21.19,30.33 ; U1.G8 21.02,30.15 ; U1.G8 21.37,30.15 ; 20.75,35.22 20.92,35.06 20.92,34.33 U1.G2 U1.F2 ; v1(23.39,29.25) U1.K9 ; U1.K9 23.14,29.68 ; U1.K9 22.97,29.5 ; U1.K9 23.14,29.32 ; U1.K9 23.32,29.5 ; 22.49,28.67 U1.J10 ; U1.J10 v1(22.74,28.6) ; U1.J10 22.32,28.85 ; U1.J10 22.49,29.03 ; U1.J10 22.67,28.85 ; 28.17,26.7 U8.A1 ; U8.A1 28.42,26.95 ; U8.A1 28.52,27.3 v1(29.41,27.3) ; 39.99,27.23 U7.C5 ; U7.C5 39.99,27.73 ; U7.C5 40.24,27.48 ; U7.C5 v1(40.36,27.85) ; 28.17,33.1 U8.J1 ; U8.J1 v1(27.8,32.98) ; U8.J1 27.92,33.35 ; 23.14,28.67 U1.K10 ; U1.K10 v1(23.39,28.6) ; U1.K10 23.32,28.85 ; U1.K10 22.97,28.85 ; U1.K10 23.14,29.03 ; 20.37,34.05 U1.F2 ; U1.F2 20.54,33.87 ; U1.F2 20.54,34.23 ; U1.G7 21.37,30.8 ; U1.G7 21.19,30.62 ; U1.G7 v1(20.95,31.05) ; U1.G7 21.19,30.98 ; U1.G7 21.02,30.8 ; U1.D7 19.24,30.98 ; U1.D7 19.24,30.62 ; U1.D7 19.07,30.8 ; U1.D7 19.42,30.8 ; U1.D7 v1(19,31.05) ; 24.44,29.32 U1.M9 ; U1.M9 v1(24.69,29.25) ; U1.M9 24.27,29.5 ; U1.M9 24.62,29.5 ; U1.M9 24.44,29.68 ; U1.J8 22.67,30.15 ; U1.J8 22.49,29.97 ; U1.J8 22.49,30.33 ; U1.J8 v1(22.74,29.9) ; U1.J8 22.32,30.15 ; U7.F7 41.59,30.13 ; U7.F7 v1(41.99,29.48) ; U7.F7 41.84,29.88 ; U7.F7 41.33,29.88 ; U7.F7 41.59,29.63 ; U1.D8 19.24,30.33 ; U1.D8 19.07,30.15 ; U1.D8 v1(19,29.9) ; U1.D8 19.42,30.15 ; U1.D8 19.24,29.97 ; U8.D7 32.97,29.6 ; U8.D7 v1(32.66,29.66) ; U8.D7 32.72,29.35 ; v1(37.76,32.83) 38,33.08 U7.K3 ; 22.32,30.8 U1.J7 ; U1.J7 22.49,30.98 ; U1.J7 22.49,30.62 ; U1.J7 v1(22.81,30.8)
  BOTTOM w0.178: F1.24 2.81,23.44 ; F1.24 1.24,22.62 ; F1.24 4.39,22.62 ; P1.4 17.65,50.36 ; P1.4 18.5,49.5 ; P1.4 16.8,49.5 ; P1.4 17.65,48.65 ; P1.12 27.81,50.36 ; P1.12 26.96,49.5 ; P1.12 27.81,48.65 ; P1.12 28.66,49.5 ; 25.27,48.65 P1.10 ; P1.10 26.12,49.5 ; P1.10 25.27,50.36 ; P1.10 24.42,49.5 ; 37.97,48.65 P1.20 ; P1.20 38.82,49.5 ; P1.20 37.12,49.5 ; P1.20 37.97,50.36 ; P2.20 9.78,24.98 ; P2.20 9.78,23.28 ; P2.20 10.63,24.13 ; P2.20 8.93,24.13 ; P1.6 21.04,49.5 ; P1.6 20.19,50.36 ; P1.6 19.34,49.5 ; P1.6 20.19,48.65 ; P1.16 33.74,49.5 ; P1.16 32.89,48.65 ; P1.16 32.04,49.5 ; P1.16 32.89,50.36 ; 20.75,35.22 20.57,35.4 v1(20.57,36.58) ; J5.4 46.34,11.71 ; J5.4 45.49,10.86 ; J5.4 44.64,11.71 ; J5.4 45.49,12.56 ; 13.17,36.83 P2.29 11.47,36.83 ; 12.32,13.12 P2.11 ; P2.11 13.17,13.97 ; P2.11 11.47,13.97 ; 1.24,36.52 F1.23 ; F1.23 4.39,36.52 ; F1.23 2.81,35.71 ; P1.14 30.35,50.36 ; P1.14 31.2,49.5 ; P1.14 29.5,49.5 ; P1.14 30.35,48.65 ; 21.88,49.5 P1.8 ; P1.8 23.58,49.5 ; P1.8 22.73,50.36 ; P1.8 22.73,48.65 ; 34.58,49.5 P1.18 ; P1.18 35.43,48.65 ; P1.18 35.43,50.36 ; P1.18 36.28,49.5 ; v1(25.53,35.97) 25.53,35.42 25.32,35.21 ; 24.07,35.21 v1(24.07,36.6)
  BOTTOM w0.254: F1.21 v1(3.75,24.82) ; F1.24 v1(2.81,21.08) ; F1.2 v1(3.97,34.32) ; F1.23 v1(2.81,37.94)
  vias: v1(25.65,8.64)
VBAT: length 11.2
  TOP w0.178: U5.1 40.33,7.84 v1(40.06,7.57) 40.07,7.56 40.52,7.56 40.73,7.77 U5.2
  TOP w0.254: C30.2 v1(36.48,2.52) ; R15.1 v1(35.71,4.72)
  POWER w0.178: J5.2 45.49,7.48 ; J5.2 46.34,6.63 ; J5.2 45.49,5.78 ; J5.2 44.64,6.63
  BOTTOM w0.508: v1(40.06,7.57) 40.06,4.12 v1(39.5,3.56)
VDDA: length 16.5
  TOP w0.102: v1(26.8,35.69) 27.18,36.07 L1.2 C4.1 27.23,37.72 27.51,37.72 27.52,37.73 v1(27.71,37.73)
  SIG w0.102: v1(27.71,37.73) 23.47,37.73 22.44,36.69 21.35,36.69 20.83,36.17 18.72,36.17 18.63,36.08 v1(18.07,36.08)
  BOTTOM w0.102: v1(26.8,35.69) 26.57,35.46 26.57,34.87 U1.R1 U1.P1 ; U1.C1 18.59,35.56 v1(18.07,36.08)
BOOT0: length 12.7
  TOP w0.102: R2.1 24.77,39.46 24.26,38.95 24.26,37.38 24.02,37.13 23.67,37.13 22.35,35.81 22.35,33.25 21.61,32.51 19.87,32.51 v1(19,31.64)
  BOTTOM w0.102: U1.D6 19,31.7 v1(19,31.64)
BOOT1: length 26.6
  TOP w0.102: R3.1 27.18,39.37 27.38,39.57 27.71,39.57 v1(27.81,39.67) ; v1(24.07,31.45) 24.67,32.05 25.96,32.05 26.35,32.45 27.23,32.45 27.46,32.22 28.79,32.22 29.14,32.56 30.05,32.56 30.61,33.12 31.17,33.12 32.31,34.26 34.92,34.26 35.89,35.23 v1(36.2,35.23)
  SIG w0.102: v1(27.81,39.67) 28.13,39.67 28.22,39.76 33.36,39.76 36.2,36.93 v1(36.2,35.23)
  BOTTOM w0.102: v1(24.07,31.45) U1.M6
BYPASS: length 15.4
  TOP w0.102: v1(30.48,40.26) 30.33,40.11 30.33,36.69 29.07,35.43 27.68,35.43 26.94,34.68 25.23,34.68 24.34,33.79 24.34,33.22 v1(24.04,32.93) ; R10.1 27.23,40.26 v1(27.69,40.26)
  BOTTOM w0.102: v1(24.04,32.93) 23.98,32.93 U1.L4 ; v1(30.48,40.26) v1(27.69,40.26)
OSC32-IN: length 7.3
  TOP w0.102: v1(19.61,36.58) 19.22,36.97 17.21,36.97 16.53,37.65 O1.2 16.53,39.4 C2.2
  BOTTOM w0.102: v1(19.61,36.58) 19.61,34.98 U1.E1
OSC32-OUT: length 5.6
  TOP w0.102: C52.2 18.69,39.42 19,39.12 19,38.05 O1.1 19.03,37.65 19.43,37.25 19.61,37.25 20.09,36.77 v1(20.09,36.58)
  BOTTOM w0.102: U1.F1 20.09,35.15 v1(20.09,36.58)
OSC-IN: length 7.9
  TOP w0.102: C1.2 21.33,41.38 21.65,41.06 21.65,38.69 20.87,37.91 O2.3 21.19,37.44 21.19,37.35 v1(21.46,37.08)
  BOTTOM w0.102: U1.G1 21.19,36.31 21.46,36.58 v1(21.46,37.08)
OSC-OUT: length 7.9
  TOP w0.102: 23.07,39.91 22.28,39.12 v1(22.28,37.09) ; 23.07,39.91 22.23,40.76 C51.2 ; 23.07,39.91 O2.1
  BOTTOM w0.102: v1(22.28,37.09) 22.28,36.77 22.28,36.77 22.28,35.64 22.33,35.59 22.33,35.26 22.32,35.25 22.32,35.19 22.28,35.15 22.28,35.13 U1.H1
PA0: length 54.6
  TOP w0.102: R21.1 v1(43.43,8.13) 43.03,8.13 43.01,8.15 U5.7 ; v1(33.78,38.23) 33.22,38.23 32.88,37.88 32.88,37.77 29.48,34.37 28.25,34.37 27.58,33.69 v1(25.43,33.69)
  SIG w0.102: v1(43.37,22.92) 45.34,24.89 45.34,36.7 v1(44.09,37.95)
  BOTTOM w0.102: v1(43.37,22.92) 43.37,22.61 43.43,22.54 v1(43.43,8.13) ; U1.N3 25.25,33.56 25.29,33.56 v1(25.43,33.69) ; v1(33.78,38.23) 43.81,38.23 v1(44.09,37.95)
PA1: length 57.6
  TOP w0.102: U3.5 v1(37.99,15.77)
  SIG w0.102: v1(44.83,39.24) 46.18,37.9 46.18,23.96 v1(37.99,15.77)
  BOTTOM w0.102: U1.N2 25.4,34.36 25.4,34.82 26.06,35.48 26.06,35.79 26.84,36.58 28.09,36.58 30.98,39.47 44.61,39.47 v1(44.83,39.24)
PA2: length 55.9
  TOP w0.102: U3.7 v1(36.99,15.34)
  SIG w0.102: v1(36.99,15.34) 45.9,24.25 45.9,37.57 v1(44.78,38.68)
  BOTTOM w0.102: v1(44.78,38.68) 44.48,38.99 31.14,38.99 26.52,34.37 26.06,34.37 U1.P2
PA3: length 54.6
  TOP w0.102: U3.8 v1(36.49,14.78)
  SIG w0.102: v1(44.32,38.48) 45.62,37.19 45.62,24.61 36.49,15.48 v1(36.49,14.78)
  BOTTOM w0.102: v1(44.32,38.48) 44.1,38.71 31.39,38.71 26.73,34.05 U1.R2
PA4: length 44.7
  TOP w0.102: v1(25.34,32.93) 25.59,33.18 27.35,33.18 28.34,34.16 29.72,34.16 v1(33.27,37.72)
  SIG w0.102: v1(14.99,39.62) 15.65,38.96 32.03,38.96 v1(33.27,37.72)
  BOTTOM w0.102: v1(25.34,32.93) 25.28,32.93 U1.N4 ; v1(14.99,39.62) 13.91,40.7 9.23,40.7 7.11,38.59 7.11,34.16 6.77,33.82 F1.3
PA5: length 44.5
  SIG w0.102: v1(33.45,37.21) 32.61,37.21 31.14,38.68 15.25,38.68 v1(14.9,39.03)
  BOTTOM w0.102: v1(33.45,37.21) 30.28,34.04 28.19,34.04 27.2,33.05 26.04,33.05 U1.P4 ; F1.4 6.91,33.32 7.49,33.91 7.49,38.57 9.34,40.42 13.51,40.42 v1(14.9,39.03)
PA6: length 44.4
  TOP w0.102: v1(5.33,36.32) 5.33,37.06 R30.2
  SIG w0.102: v1(31.35,37.92) 30.86,38.4 15.29,38.4 v1(14.61,37.72)
  BOTTOM w0.102: v1(14.61,37.72) 14.44,37.88 9.34,37.88 7.85,36.39 7.85,33.87 6.8,32.82 F1.5 4.01,32.82 3.57,33.26 3.57,34.99 3.89,35.31 4.32,35.31 v1(5.33,36.32) ; U1.P3 26.08,33.73 26.92,33.73 30.75,37.56 30.99,37.56 v1(31.35,37.92)
PA7: length 36
  SIG w0.102: v1(14.87,37.32) 15.68,38.12 30.06,38.12 30.72,37.47 v1(31.62,37.47)
  BOTTOM w0.102: F1.6 6.76,32.32 8.69,34.25 8.69,34.69 9.76,35.76 12.71,35.76 14.26,37.32 v1(14.87,37.32) ; v1(31.62,37.47) 28.47,34.32 28.01,34.32 27.09,33.4 U1.R3
PA8: length 20.6
  TOP w0.102: v1(30.78,11.91) 31.83,11.91 32.16,11.59 U2.3 ; v1(23.97,17.4) 20.79,20.58 v1(20.79,20.95)
  BOTTOM w0.102: v1(30.78,11.91) 29.46,11.91 v1(23.97,17.4) ; U1.F15 20.79,25.35 v1(20.79,20.95)
PA9: length 47.9
  SIG w0.102: v1(19.89,22.43) 39.56,22.43 44.83,27.7 44.83,36.4 43.7,37.53 43.7,38.8 44.77,39.87 44.77,42.96 J2.2
  BOTTOM w0.102: U1.E15 v1(19.89,22.43)
PA10: length 50.2
  SIG w0.102: J2.1 44.28,42.96 44.28,39.78 43.42,38.91 43.42,36.88 44.55,35.75 44.55,27.81 39.57,22.83 19.53,22.83 19.31,22.61 17.95,22.61 v1(17.39,23.18)
  BOTTOM w0.102: U1.D15 19.24,25.04 v1(17.39,23.18)
PA11: length 25.7
  TOP w0.102: v1(20.45,6.6) 20.42,6.63 U6.3 ; v1(15.88,23.62) v1(15.88,7.11)
  BOTTOM w0.102: U1.C15 18.59,25.42 16.79,23.62 v1(15.88,23.62) ; v1(15.88,7.11) 16.51,6.48 20.32,6.48 v1(20.45,6.6)
PB5: length 19.3
  TOP w0.102: v1(30.86,33.76) 30.61,34.01 30.21,34.01 29.88,33.69 29.88,33.66 29.24,33.01 29.01,33.01 28.63,32.63 27.63,32.63 27.4,32.85 26.01,32.85 25.62,32.46 23.85,32.46 v1(23.33,31.94)
  SIG w0.102: v1(16.95,31.45) 17.77,31.45 17.99,31.67 17.99,31.79 18.2,31.99 19.68,31.99 19.74,32.05 22.18,32.05 22.29,31.94 v1(23.33,31.94)
  BOTTOM w0.102: v1(30.86,33.76) 30.86,33.22 30.56,32.91 30.56,31.37 30.13,30.95 U8.F3 ; U1.A6 v1(16.95,31.45)
PB6: length 25.1
  TOP w0.102: v1(34.57,35.94) 34.57,35.38 R35.1
  SIG w0.102: v1(34.57,33.91) 32.77,33.91 32.46,34.21 31.77,34.21 31.19,34.79 27.22,34.79 27.2,34.77 22.62,34.77 22.51,34.66 19.83,34.66 19.81,34.68 19.52,34.68 19.04,34.21 18.44,34.21 17.79,33.56 17.79,31.97 v1(17.63,31.81)
  BOTTOM w0.102: 17.94,31.43 U1.B6 17.7,31.7 17.7,31.74 v1(17.63,31.81) ; v1(34.57,35.94) v1(34.57,33.91) 34.92,33.56 34.92,32.1 U8.G9
PB7: length 38
  TOP w0.102: v1(45.8,39.73) 44.32,39.73 43.61,39.01 38.82,39.01 36,36.2 v1(35.69,36.2)
  SIG w0.102: v1(35.69,36.2) 35.51,36.37 33.25,36.37 32.99,36.63 31.93,36.63 31.81,36.76 27.58,36.76 27.34,37 23.54,37 22.66,36.12 21.57,36.12 21.06,35.61 18.95,35.61 18.74,35.41 17.38,35.41 16.18,34.21 v1(16.18,32.38)
  BOTTOM w0.102: v1(45.8,39.73) J4.2 ; U1.B5 17.66,32.38 v1(16.18,32.38)
PB8: length 34.7
  TOP w0.102: v1(35.79,36.78) 38.3,39.29 41.1,39.29 J4.1
  SIG w0.102: v1(15.7,32.18) 15.7,34.11 15.9,34.32 15.9,34.32 17.26,35.69 18.63,35.69 18.83,35.89 20.95,35.89 21.46,36.41 22.55,36.41 23.42,37.28 27.45,37.28 27.69,37.04 31.93,37.04 32.05,36.91 33.19,36.91 33.32,36.78 v1(35.79,36.78)
  BOTTOM w0.102: v1(15.7,32.18) 15.89,31.99 16.34,31.99 16.45,32.1 U1.A5
PB12: length 33.2
  TOP w0.102: v1(44.2,30.35) 40.41,26.57 37.57,26.57 37.34,26.8 32.98,26.8 32.93,26.75 31.6,26.75 31.19,27.15 30.47,27.15 30.23,26.91 28.24,26.91 27.93,27.22 v1(27.25,27.22)
  SIG w0.102: J3.3 40.72,35.1 44.2,31.62 v1(44.2,30.35)
  BOTTOM w0.102: v1(27.25,27.22) 26.08,27.22 U1.P12
PB13: length 34.5
  TOP w0.102: v1(27.25,26.77) 27.43,26.6 30.46,26.6 30.61,26.44 30.91,26.44 31,26.53 35.42,26.53 35.59,26.37 40.84,26.37 v1(44.2,29.72)
  SIG w0.102: J3.2 38.18,37.28 43.76,31.69 43.76,30.15 v1(44.2,29.72)
  BOTTOM w0.102: U1.P13 26.02,26.62 26.75,26.62 26.9,26.77 v1(27.25,26.77)
PB14: length 35
  TOP w0.102: v1(27.03,26.39) 27.51,26.39 27.51,26.39 30.37,26.39 30.53,26.24 30.99,26.24 31.08,26.33 35.22,26.33 35.46,26.09 41.07,26.09 v1(44.07,29.08)
  SIG w0.102: J3.1 35.64,39.42 43.38,31.67 43.38,29.77 v1(44.07,29.08)
  BOTTOM w0.102: U1.R14 26.89,26.25 v1(27.03,26.39)
PB15: length 33.9
  TOP w0.102: v1(26.95,25.65) 27.17,25.44 29.17,25.44 29.17,25.44 30.27,25.44 30.56,25.73 31.8,25.73 31.87,25.79 32.98,25.79 33.2,25.58 41.07,25.58 48.34,32.85 J4.3
  BOTTOM w0.102: U1.R15 26.9,25.6 v1(26.95,25.65)
PC0: length 17
  SIG w0.102: v1(25.04,35.54) 25.82,35.54 26.36,36.08 26.96,36.08 27.2,35.84 31.43,35.84 31.59,35.69 32,35.69 33.13,34.56 34.22,34.56 34.23,34.57 35.28,34.57 v1(35.56,34.29)
  BOTTOM w0.102: v1(35.56,34.29) 35.56,31.94 U8.F9 ; U1.M2 24.74,34.35 24.74,35.24 v1(25.04,35.54)
PC1: length 21.6
  TOP w0.102: v1(24.72,33.67) 24.72,33.86 25.28,34.42 27.17,34.42 27.81,35.05 29.09,35.05 30.81,36.77 30.81,39.76 31.1,40.06 31.1,41.38 34.74,45.02 37.15,45.02 J1.2
  BOTTOM w0.102: U1.M3 24.58,33.53 24.58,33.53 v1(24.72,33.67)
PC2: length 18.6
  TOP w0.102: J1.1 34.59,43.99 32.02,41.41 32.02,37.3 29.41,34.7 27.97,34.7 27.43,34.16 25.4,34.16 25.07,33.84 25.07,33.31 v1(24.69,32.93)
  BOTTOM w0.102: v1(24.69,32.93) 24.63,32.93 U1.M4
PC3: length 31.4
  TOP w0.102: J2.3 47.02,42.67 47.02,40.18 42.52,35.69 35.95,35.69 34.82,34.56 32.21,34.56 30.98,33.33 30.53,33.33 29.97,32.77 29.05,32.77 28.71,32.42 27.55,32.42 27.32,32.65 26.1,32.65 25.7,32.26 24.35,32.26 v1(24.05,31.96)
  BOTTOM w0.102: U1.M5 24.3,31.96 v1(24.05,31.96)
PC6: length 38.9
  TOP w0.102: v1(8.64,43.38) 8.64,36.48 9.69,35.43 10.13,35.43 10.83,34.73 10.83,28.8 10.67,28.64 v1(10.67,28.32)
  SIG w0.102: v1(10.67,28.32) 11.05,27.94 11.05,26.45 12.23,25.27 14.78,25.27 16.99,23.06 16.99,23.01 18.16,21.84 v1(21.83,21.84)
  BOTTOM w0.102: U1.H15 21.84,22.17 21.83,22.16 v1(21.83,21.84) ; v1(8.64,43.38) 11.25,43.38 P2.35
PD0: length 30.1
  SIG w0.102: v1(17.63,27.27) 17.63,26.65 20.32,23.96 23.38,23.96 23.58,23.76 28.31,23.76 v1(29.59,25.05) ; v1(37.82,31.24) v1(37.82,32.26)
  BOTTOM w0.102: 17.7,27.3 17.66,27.27 v1(17.63,27.27) 17.77,27.41 17.8,27.41 U1.B12 ; U7.K4 38.74,32.63 38.19,32.63 v1(37.82,32.26) ; v1(37.82,31.24) 37.31,30.73 37.31,29.33 35.52,27.53 35.03,27.53 34.9,27.4 34.12,27.4 U8.B8 33.37,28.15 32.7,28.15 32.63,28.21 32.34,28.21 31.46,27.33 31.46,26.91 v1(29.59,25.05)
PD1: length 29.8
  SIG w0.102: v1(36.88,33.07) 37.24,33.43 v1(39.6,33.43) ; v1(18.35,27.3) 18.35,26.66 18.76,26.25 18.9,26.25 20.57,24.57 23.63,24.57 23.84,24.37 27.42,24.37 28.88,25.83 v1(29.59,25.83) ; v1(35.25,28.87) 34.59,28.21 32.17,28.21 v1(30.76,26.8)
  BOTTOM w0.102: U7.K5 39.64,33.43 v1(39.6,33.43) ; v1(30.76,26.8) 30.02,26.06 29.82,26.06 v1(29.59,25.83) ; v1(36.88,33.07) 36.88,31.5 36.6,31.22 36.6,30.2 35.53,29.13 35.51,29.13 v1(35.25,28.87) 34.89,28.87 U8.C9 ; U1.C12 v1(18.35,27.3)
PD4: length 21.8
  TOP w0.102: v1(19,28.6) 19.74,27.86 24.89,27.86 25.22,27.53 26.78,27.53 27.02,27.78 27.65,27.78 28.29,28.42 35.29,28.42 35.42,28.54 36.72,28.54 v1(37.34,27.92)
  BOTTOM w0.102: v1(37.34,27.92) 38.83,27.92 U7.D4 ; v1(19,28.6) U1.D10
PD5: length 28.2
  SIG w0.102: v1(30.99,25.27) 30.82,25.44 28.92,25.44 27.55,24.07 23.71,24.07 23.51,24.27 20.44,24.27 17.99,26.72 17.99,27.6 v1(18.35,27.95)
  BOTTOM w0.102: v1(18.35,27.95) U1.C11 ; v1(30.99,25.27) 31.25,25.01 39.12,25.01 U7.C7
PD6: length 30.3
  SIG w0.102: v1(30.51,25.05) 30.28,24.82 30.16,24.82 28.79,23.46 23.46,23.46 23.27,23.65 20.2,23.65 17.28,26.57 17.28,27.54 v1(17.69,27.95)
  BOTTOM w0.102: U7.C8 39.61,24.7 30.85,24.7 v1(30.51,25.05) ; U1.B11 17.7,27.95 v1(17.69,27.95)
PD8: length 5
  BOTTOM w0.102: U8.B2 28.68,27.75 28.23,27.3 28.02,27.3 27.82,27.1 27.82,26.02 27.1,25.3 26.05,25.3 U1.P15
PD9: length 3.8
  BOTTOM w0.102: U1.P14 26.02,25.97 26.76,25.97 26.8,26.01 27.25,26.01 27.61,26.37 27.61,27.19 U8.B1
PD10: length 5.8
  BOTTOM w0.102: U8.A2 28.97,26 27.68,24.71 25.8,24.71 25.09,25.42 U1.N15
PD11: length 18.5
  SIG w0.102: v1(32.03,25.4) 31.61,25.82 30.6,25.82 30.23,26.19 28.6,26.19 v1(28.24,25.83)
  BOTTOM w0.102: v1(28.24,25.83) 27.46,25.04 25.91,25.04 25.43,25.53 25.43,25.92 U1.N14 ; U7.D5 39.62,27.91 39.62,26.37 38.66,25.4 v1(32.03,25.4)
PD12: length 15.3
  TOP w0.102: v1(25.4,26.61) 25.98,26.03 27.58,26.03 27.74,26.19 30.29,26.19 30.44,26.04 31.08,26.04 31.13,26.09 33.22,26.09 33.34,25.97 v1(33.66,25.97)
  BOTTOM w0.102: U7.C4 38.76,27.05 36.25,27.05 35.17,25.97 v1(33.66,25.97) ; U1.N13 25.38,26.61 v1(25.4,26.61)
PD14: length 20.8
  SIG w0.102: v1(24.99,24.79) 27.25,24.79 27.85,25.39 27.85,25.99 28.25,26.39 30.32,26.39 30.47,26.24 32.63,26.24 33.4,27.01 v1(33.4,27.33)
  BOTTOM w0.102: U7.H4 38.74,31.03 38.14,31.03 37.61,30.5 37.61,29.11 35.07,26.57 34.15,26.57 U8.A8 33.4,27.32 v1(33.4,27.33) ; U1.M14 24.77,25.93 24.77,25.39 24.99,25.16 v1(24.99,24.79)
PD15: length 22
  SIG w0.102: v1(24.51,24.87) 24.82,25.18 27.09,25.18 27.55,25.64 27.55,26.07 28.07,26.6 30.46,26.6 30.61,26.44 32.46,26.44 33.05,27.03 33.05,27.48 33.49,27.92 35.36,27.92 v1(35.58,28.15)
  BOTTOM w0.102: U8.B9 35.18,27.75 v1(35.58,28.15) 37.01,29.58 37.01,30.93 37.9,31.83 38.74,31.83 U7.J4 ; v1(24.51,24.87) 24.14,25.24 24.14,25.9 U1.L14
PDR_ON: length 3.4
  TOP w0.102: v1(18.35,31.64) 18.21,31.5 18.15,31.5 18.05,31.4 17.55,31.4 17.52,31.38 17.5,31.38 17.32,31.55 17.32,31.58 17.09,31.81 16.49,31.81 16.06,31.37 R8.1
  BOTTOM w0.102: v1(18.35,31.64) 18.35,31.7 U1.C6
PE0: length 25.1
  SIG w0.102: v1(35.03,30.58) 35.03,33.95 34.72,34.26 34.36,34.26 34.35,34.25 32.85,34.25 32.44,34.67 31.74,34.67 31.32,35.1 27.22,35.1 27.1,34.98 22.55,34.98 22.43,34.87 19.92,34.87 19.9,34.88 19.43,34.88 19.35,34.8 18.42,34.8 17.58,33.96 17.58,33.43 v1(16.9,32.75)
  BOTTOM w0.102: U1.A4 v1(16.9,32.75) ; U8.E8 34.2,30.58 v1(35.03,30.58)
PE1: length 24.7
  SIG w0.102: v1(32,35.1) 31.74,35.1 31.44,35.4 27.09,35.4 26.88,35.19 22.46,35.19 22.35,35.07 20.01,35.07 19.99,35.09 19.35,35.09 19.26,35 18.33,35 17.22,33.89 17.22,33.72 v1(16.9,33.4) ; v1(28.58,30.49) 28.8,30.49 28.89,30.39 30.92,30.39 v1(31.11,30.58)
  BOTTOM w0.102: v1(31.11,30.58) 31.5,30.96 31.5,34.59 v1(32,35.1) ; U1.A3 v1(16.9,33.4) ; U8.F1 28.58,30.54 v1(28.58,30.49)
PE2: length 16.7
  TOP w0.102: P2.38 11.28,45.49 11.28,44.04 12.24,43.08 12.64,43.08 13.41,42.31 13.41,38.22 14.8,36.83 15.47,36.83 16.24,36.05 16.24,35.1 v1(16.91,34.43)
  BOTTOM w0.102: U1.A2 v1(16.91,34.43)
PE4: length 22.8
  TOP w0.102: v1(15.11,36.07) 14.35,36.07 13.39,35.1 13.39,34.01 13.37,33.99 13.37,32.19 13.37,32.19 13.37,27.72 P2.21
  BOTTOM w0.102: U1.B1 17.94,35.02 17.48,35.48 16.38,35.48 15.71,36.16 15.2,36.16 v1(15.11,36.07) ; F1.15 7.15,27.82 8.72,26.25 8.72,26.23 9.34,25.62 11.26,25.62 P2.21
PE5: length 28.5
  TOP w0.102: P2.12 11.05,15.24 13.08,15.24 13.98,16.14 13.98,32.44 13.98,33.74 13.99,33.75 13.99,34.52 v1(14.61,35.14)
  BOTTOM w0.102: U1.B2 17.65,34.34 17.65,34.77 17.35,35.08 16.26,35.08 16.07,35.27 15.89,35.27 15.88,35.27 15.3,35.27 15.17,35.14 v1(14.61,35.14)
PE6: length 25.2
  TOP w0.102: v1(14.43,35.59) 13.69,34.85 13.69,33.88 13.68,33.87 13.68,32.31 13.68,32.31 13.68,17.87 P2.13
  BOTTOM w0.102: U1.B3 17.64,33.71 17.21,33.71 17.17,33.76 16.97,33.76 15.76,34.96 15.43,34.96 15.21,34.75 14.45,34.75 14.2,34.99 14.2,35.36 v1(14.43,35.59)
PE7: length 19.6
  SIG w0.102: v1(27.56,30.12) 27.88,30.12 28.19,29.81 28.19,29.48 28.45,29.22 33.1,29.22 v1(33.38,28.94)
  BOTTOM w0.102: v1(27.56,30.12) 27.24,30.12 27.14,30.23 26.47,30.23 U1.R8 ; v1(33.38,28.94) U8.C8 34.12,28.2 35.08,28.2 36.8,29.93 36.8,31.09 37.26,31.55 37.26,33.05 37.5,33.28 37.95,33.28 38.46,33.78 40.08,33.78 U7.K6
PE8: length 23.4
  SIG w0.102: v1(26.72,29.87) 26.72,30.25 27.34,30.87 28.7,30.87 28.98,30.59 30.44,30.59 30.78,30.94 32.47,30.94 33.18,30.23 33.69,30.23 v1(34.18,29.74)
  BOTTOM w0.102: U7.J7 41.94,32.63 41.94,33.6 41.31,34.23 36.64,34.23 36.32,33.91 36.32,31.78 36.12,31.57 36.12,30.58 35.19,29.65 34.87,29.65 U8.D9 v1(34.18,29.74) ; v1(26.72,29.87) 26.02,29.87 U1.P8
PE9: length 21.9
  SIG w0.102: v1(33.46,29.66) 33.02,30.1 32.38,30.1 32.14,29.86 31.23,29.86 30.96,30.13 28.37,30.13 28.02,30.47 27.41,30.47 27.15,30.22 27.15,29.36 v1(27.23,29.29)
  BOTTOM w0.102: v1(27.23,29.29) 26.91,29.29 26.85,29.22 26.02,29.22 U1.P9 ; v1(33.46,29.66) U8.D8 34.12,29 34.71,29 35.07,29.35 35.32,29.35 36.35,30.38 36.35,31.34 36.53,31.52 36.53,33.22 36.83,33.52 37.73,33.52 38.19,33.99 40.68,33.99 U7.K7
PE10: length 25.1
  SIG w0.102: v1(35.53,30.58) 33.43,28.47 28.79,28.47 27.81,29.45 27.74,29.45 v1(27.51,29.68)
  BOTTOM w0.102: v1(27.51,29.68) 27.03,29.68 26.85,29.5 U1.R9 ; U7.J8 42.8,32.69 42.8,34.04 41.81,35.03 36.64,35.03 36.12,34.51 36.12,31.98 35.53,31.39 v1(35.53,30.58) 35.1,30.15 U8.E9
PE11: length 3.5
  SIG w0.102: v1(27.02,28.58) 27.33,28.88 27.42,28.88 v1(27.65,29.1)
  BOTTOM w0.102: U1.P10 26.02,28.57 26.64,28.57 26.64,28.58 v1(27.02,28.58) ; U8.E1 28.17,29.85 27.82,29.5 27.82,29.27 v1(27.65,29.1)
